# EAGLE board cable-adapter-24 (EAGLE 6.5.0)
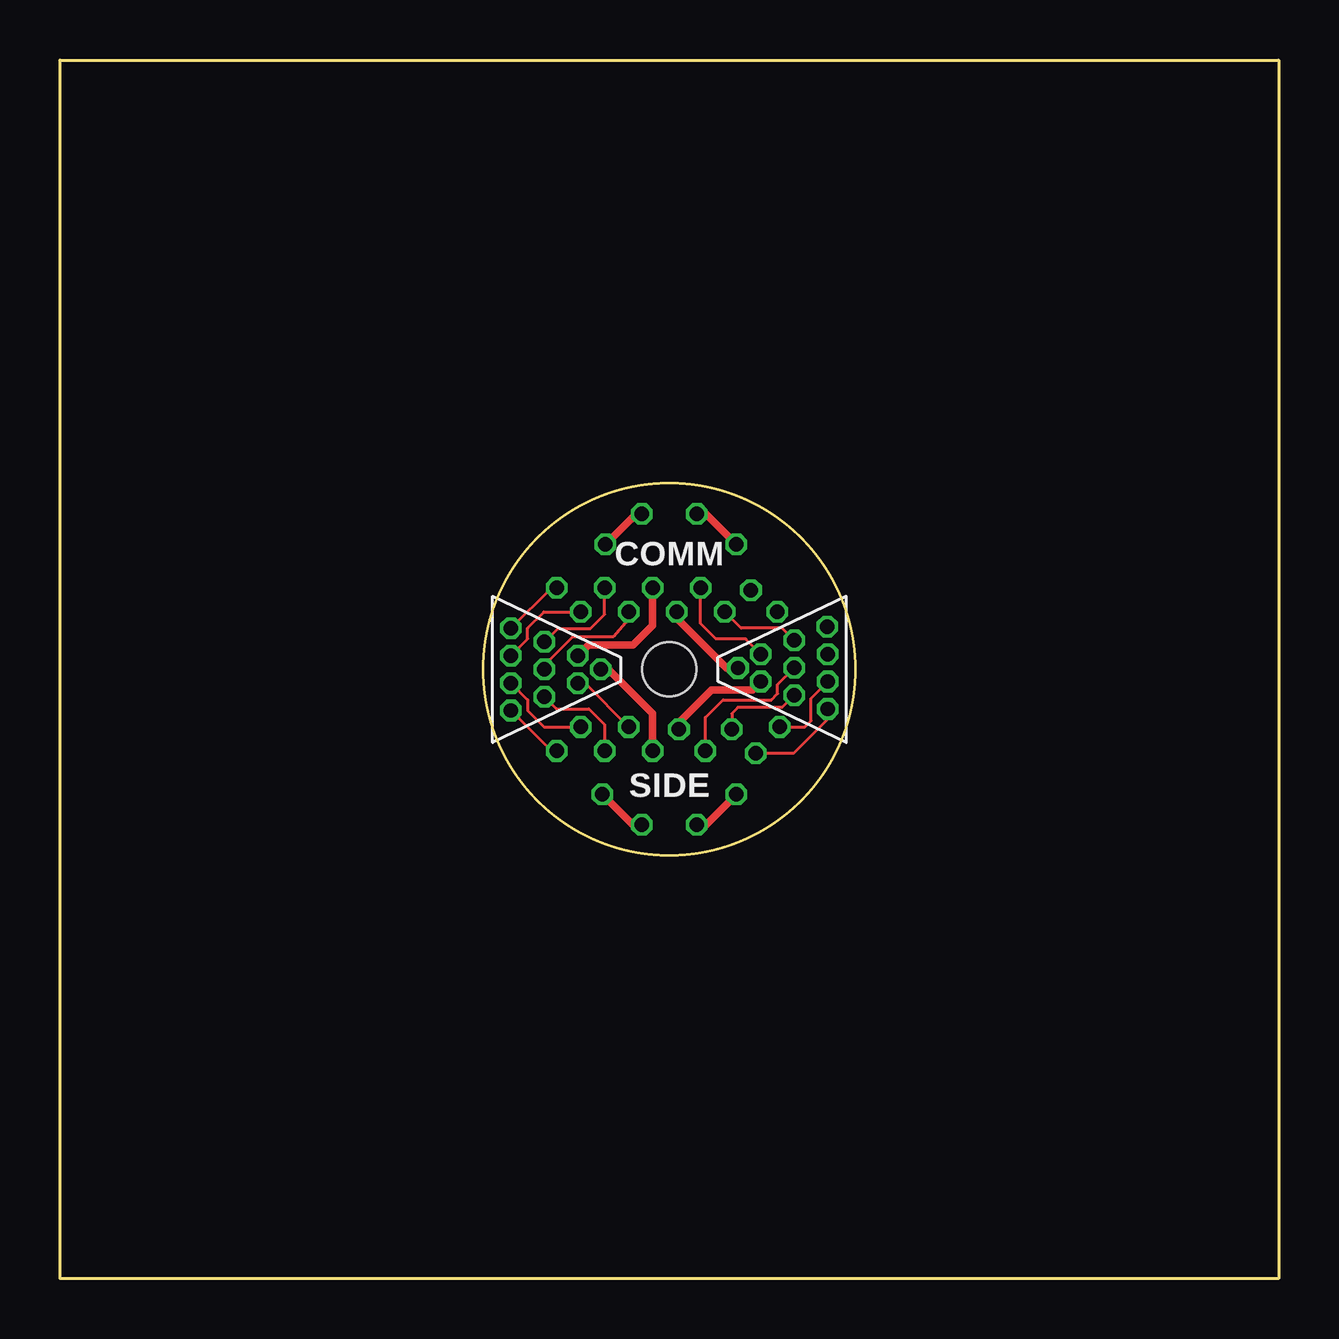
[diagram p0: board, top side]
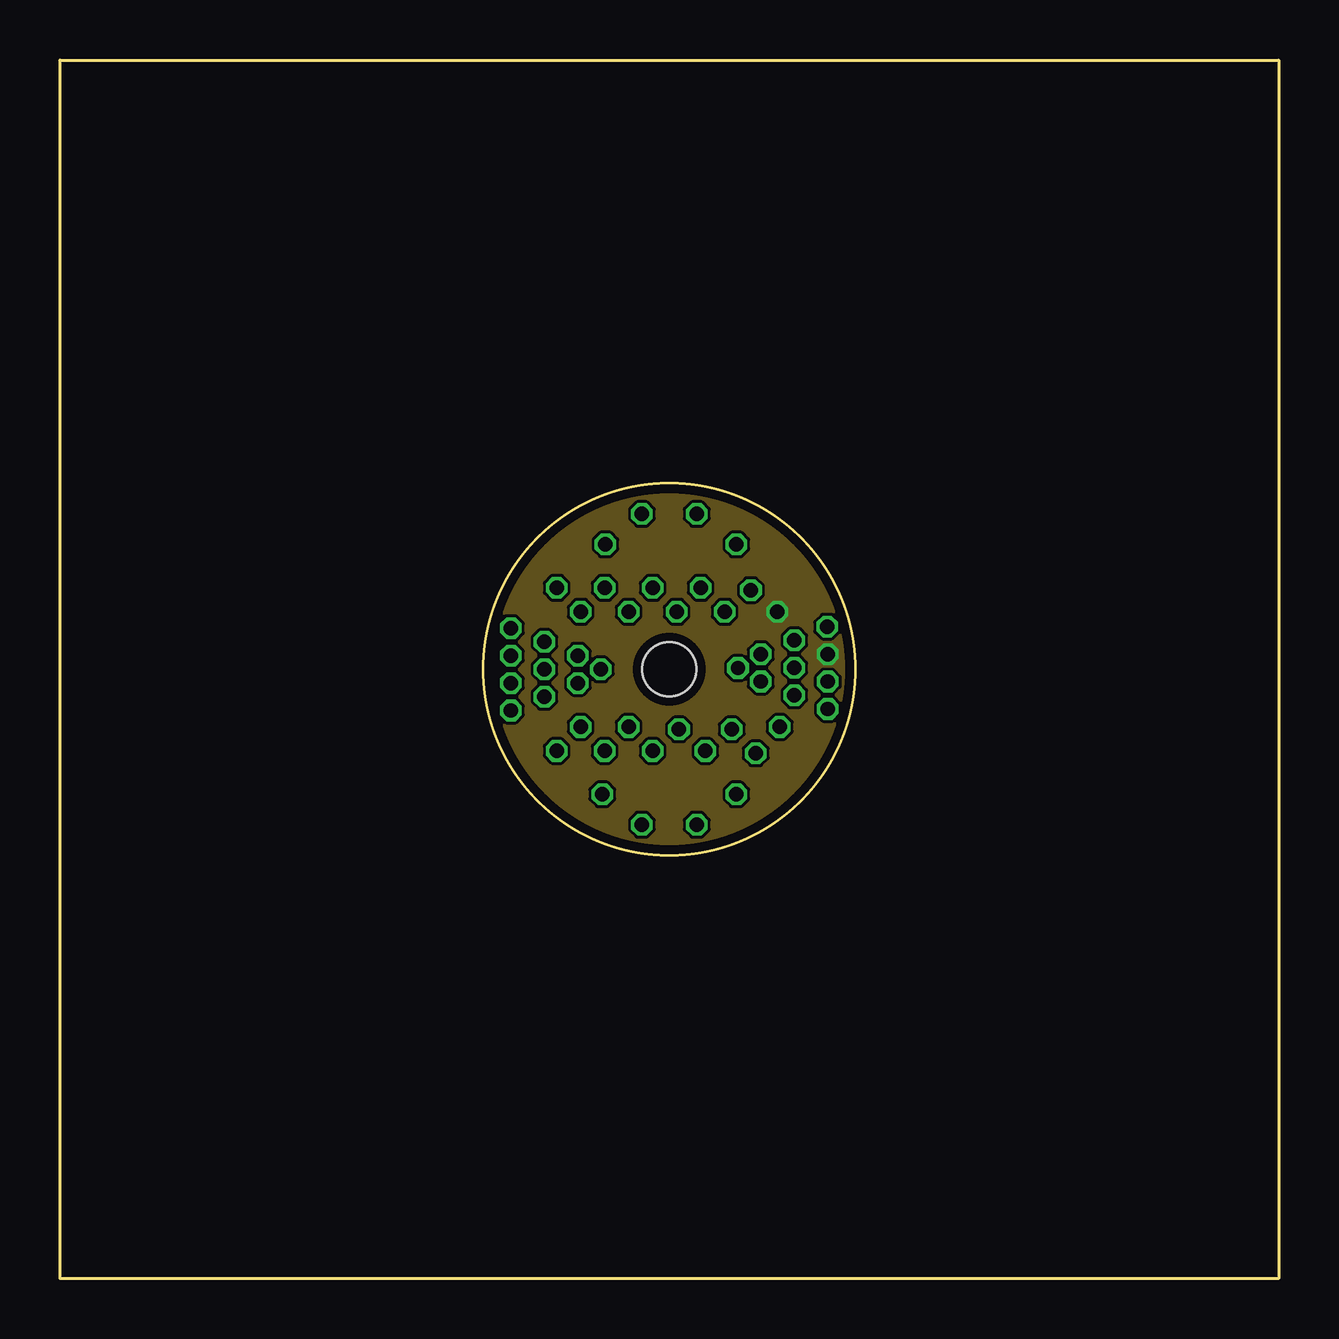
[diagram p1: board, inner layer Route2]
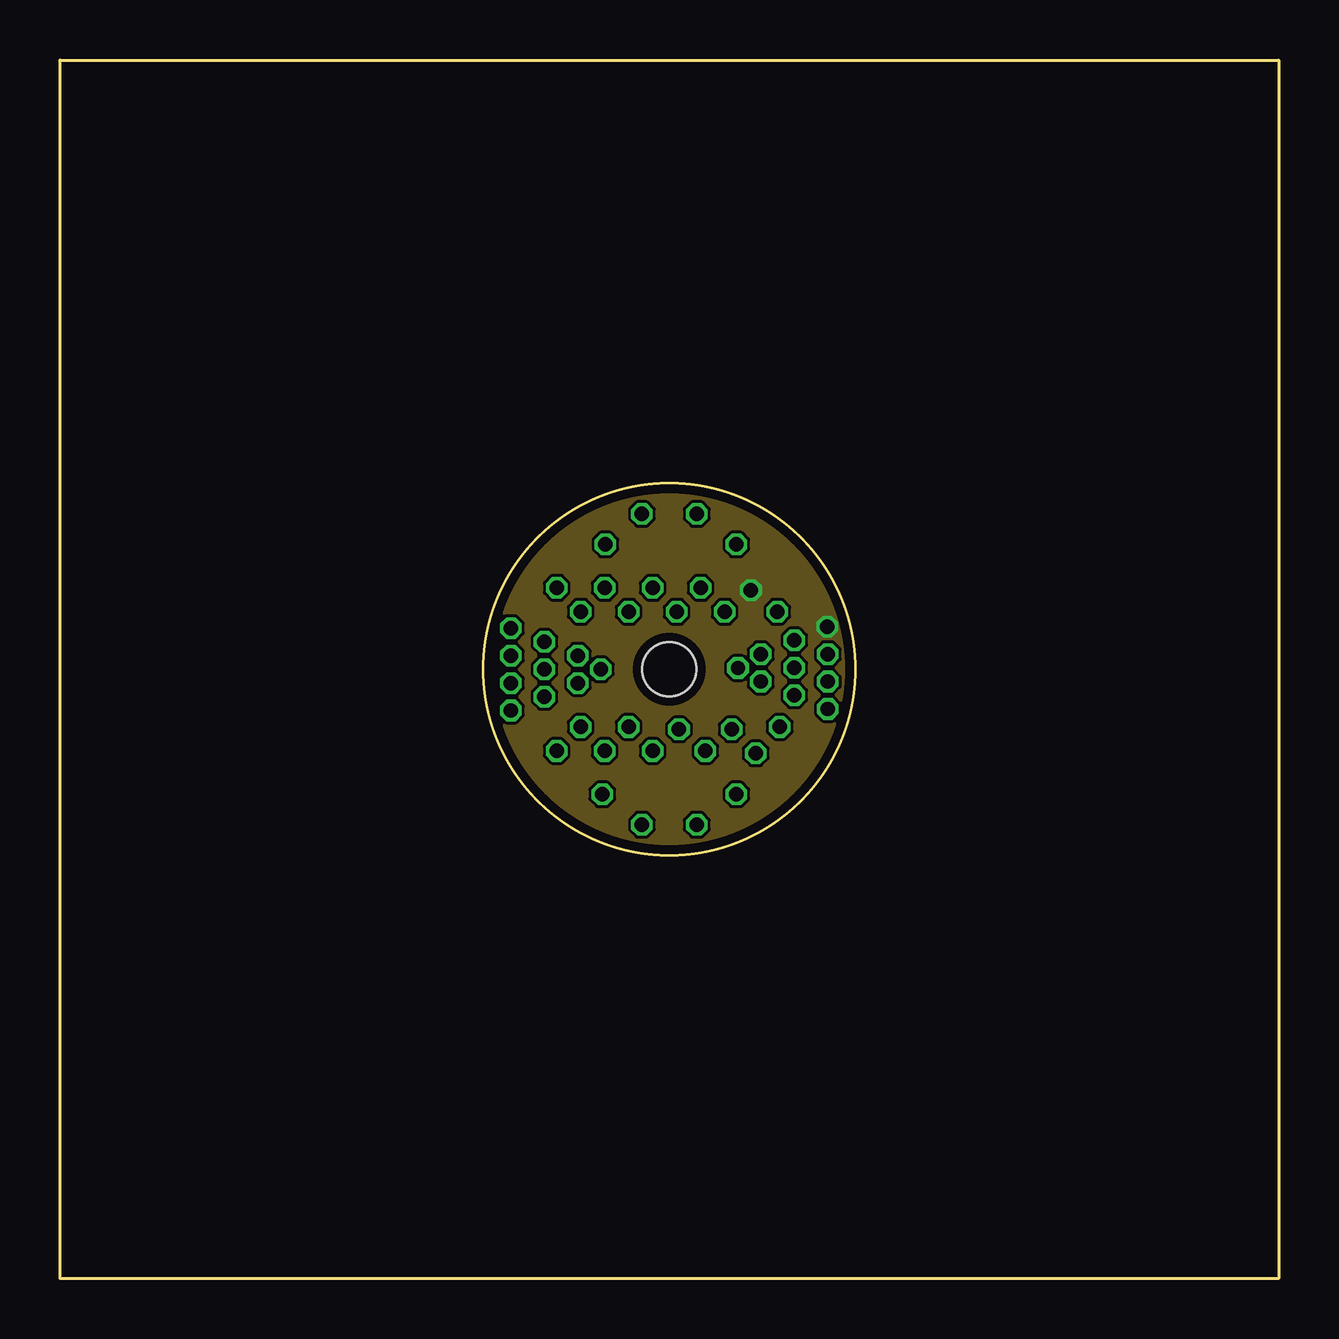
[diagram p2: board, inner layer Route15]
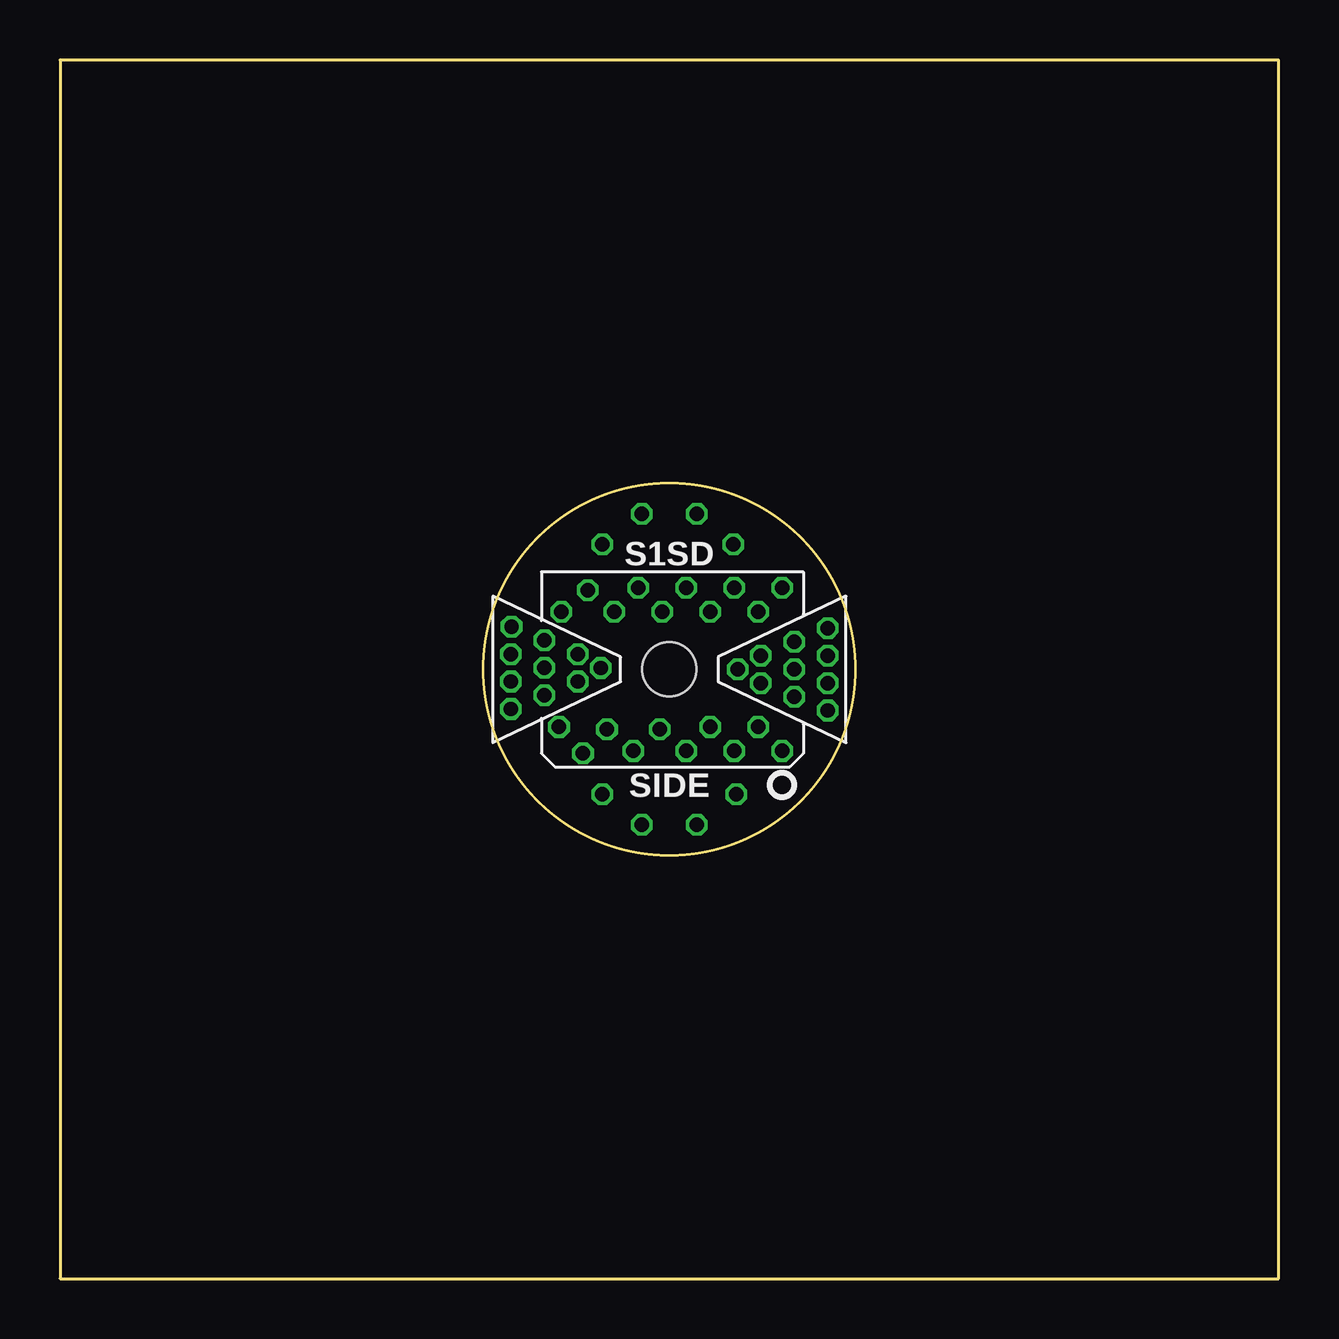
[diagram p3: board, bottom side, seen from below]

Size 50.8 x 50.8 mm. Coordinates in mm from the lower left corner, seen from the top.
Outline: 0,0 0,50.8 50.8,50.8 50.8,0 0,0
Outline: circle at 25.4,25.4 radius 7.75
Copper layers (1*2*15*16): Top 0.035559375mm / dielectric 0.17018125mm / Route2 0.01778125mm / dielectric 47mil / Route15 0.01778125mm / dielectric 0.17018125mm / Bottom 0.035559375mm
Design rules "ohs-park-4-layer": minimum track width 5mil, minimum drill 10mil, track to track 5mil, track to pad 5mil, pad to pad 5mil, via to via 5mil, smd to smd 5mil, copper to edge 15mil, drill to drill 5mil, minimum pad ring 4mil, minimum via ring 4mil, stop-mask expansion 4mil, vias tented up to drill 100mil, thermal gap 10mil
Holes 2.26 mm at 25.4,25.4

## Footprints (pad centres in the part's own frame; a part is rotated, then mirrored left to right if it is on the bottom)
SPI_WIRE+ = drill 0.6 octagon: P$1 0,0

## Placement (x,y rotation side)
_CLK+  [SPI_WIRE+]  18.8,23.69 0 top
_CLK-  [SPI_WIRE+]  18.8,24.83 0 top
_CS+  [SPI_WIRE+]  18.8,27.11 0 top
_CS-  [SPI_WIRE+]  18.8,25.97 0 top
_GND  [SPI_WIRE+]  32,26.04 0 top
_LED+1  [SPI_WIRE+]  21.59,25.97 0 top
_LED+2  [SPI_WIRE+]  28.26,25.46 0 top
_LED-1  [SPI_WIRE+]  22.54,25.4 0 top
_LED-2  [SPI_WIRE+]  29.21,24.89 0 top
_MIS03+  [SPI_WIRE+]  30.61,26.61 0 top
_MISO1+  [SPI_WIRE+]  20.19,26.54 0 top
_MISO1-  [SPI_WIRE+]  20.19,25.4 0 top
_MISO2+  [SPI_WIRE+]  30.61,25.46 0 top
_MISO2-  [SPI_WIRE+]  30.61,24.32 0 top
_MISO3-  MISO3+  [SPI_WIRE+]  29.21,26.04 0 top
_MISO4+  [SPI_WIRE+]  32,24.89 0 bottom
_MISO4-  [SPI_WIRE+]  32,23.75 0 top
_MOSI+  [SPI_WIRE+]  20.19,24.26 0 top
_MOSI-  [SPI_WIRE+]  21.59,24.83 0 top
_USR0  [SPI_WIRE+]  22.61,20.19 0 top
_USR1  [SPI_WIRE+]  28.19,20.19 0 top
_USR2  [SPI_WIRE+]  22.73,30.61 0 top
_USR3  [SPI_WIRE+]  28.19,30.61 0 top
_VCC  [SPI_WIRE+]  31.98,27.18 0 top
CLK+  [SPI_WIRE+]  20.7,22 0 top
CLK-  [SPI_WIRE+]  21.7,23 0 top
CS+  [SPI_WIRE+]  20.7,28.8 0 top
CS-  [SPI_WIRE+]  21.7,27.8 0 top
GND  [SPI_WIRE+]  29.9,27.8 0 top
LED+1  [SPI_WIRE+]  24.7,28.8 0 top
LED+2  [SPI_WIRE+]  25.7,27.8 0 top
LED-1  [SPI_WIRE+]  24.7,22 0 top
LED-2  [SPI_WIRE+]  25.8,22.9 0 top
MISO2+  [SPI_WIRE+]  26.9,22 0 top
MISO2-  [SPI_WIRE+]  28,22.9 0 top
MISO3+  [SPI_WIRE+]  27.7,27.8 0 top
MISO3-  [SPI_WIRE+]  26.7,28.8 0 top
MISO4+  [SPI_WIRE+]  30,23 0 top
MISO4-  [SPI_WIRE+]  29,21.9 0 top
MISO+  [SPI_WIRE+]  22.7,28.8 0 top
MISO-  [SPI_WIRE+]  23.7,27.8 0 top
MOSI+  [SPI_WIRE+]  22.7,22 0 top
MOSI-  [SPI_WIRE+]  23.7,23 0 top
USR0  [SPI_WIRE+]  24.26,18.92 0 top
USR1  [SPI_WIRE+]  26.54,18.92 0 top
USR2  [SPI_WIRE+]  24.26,31.88 0 top
USR3  [SPI_WIRE+]  26.54,31.88 0 top
VCC  [SPI_WIRE+]  28.8,28.7 0 top

## Library data of the parts
_CLK+ _CLK- _CS+ _CS- _GND _LED+1 _LED+2 _LED-1 _LED-2 _MIS03+ _MISO1+ _MISO1- _MISO2+ _MISO2- _MISO3- _MISO4+ _MISO4- _MOSI+ _MOSI- _USR0 _USR1-_USR3 _VCC CLK+ CLK- CS+ CS- GND LED+1 LED+2 LED-1 LED-2 MISO2+ MISO2- MISO3+ MISO3- MISO4+ MISO4- MISO+ MISO- MOSI+ MOSI- USR0 USR1-USR3 VCC = jonnew

## Nets
CS+: _CS-.P$1 CS-.P$1
CS-: _CS+.P$1 CS+.P$1
GND: _GND.P$1 GND.P$1
LED+1: _LED+1.P$1 LED+1.P$1
LED+2: _LED+2.P$1 LED+2.P$1
LED-1: _LED-1.P$1 LED-1.P$1
LED-2: _LED-2.P$1 LED-2.P$1
MIS03-: _MISO3-.P$1 MISO3-.P$1
MISO1+: _MISO1-.P$1 MISO-.P$1
MISO1-: _MISO1+.P$1 MISO+.P$1
MISO2+: _MISO2-.P$1 MISO2-.P$1
MISO2-: _MISO2+.P$1 MISO2+.P$1
MISO3+: _MIS03+.P$1 MISO3+.P$1
MISO4+: _MISO4+.P$1 MISO4+.P$1
MISO4-: _MISO4-.P$1 MISO4-.P$1
MOSI+: _MOSI-.P$1 MOSI-.P$1
MOSI-: _MOSI+.P$1 MOSI+.P$1
SCLK+: _CLK-.P$1 CLK-.P$1
SCLK-: _CLK+.P$1 CLK+.P$1
USR0: _USR0.P$1 USR0.P$1
USR1: _USR1.P$1 USR1.P$1
USR2: _USR2.P$1 USR2.P$1
USR3: _USR3.P$1 USR3.P$1
VCC: _VCC.P$1 VCC.P$1

## Tracks (layer width: path | path; a pad name or v marks a point on that pad's centre or on a via)
CS+
  Top 0.127: _CS-.P$1 19.49,26.67 19.49,27.12 20.17,27.8 CS-.P$1
CS-
  Top 0.127: _CS+.P$1 20.48,28.8 CS+.P$1
GND
  pour Route2 (no thermals): 15.24,35.56 36.83,35.56 36.83,15.24 15.24,15.24
LED+1
  Top 0.305: LED+1.P$1 24.7,27.23 23.88,26.42 22.03,26.42 _LED+1.P$1
LED+2
  Top 0.305: LED+2.P$1 25.7,27.54 27.78,25.46 _LED+2.P$1
LED-1
  Top 0.305: _LED-1.P$1 22.86,25.4 24.7,23.56 LED-1.P$1
LED-2
  Top 0.305: LED-2.P$1 25.8,23.18 27.16,24.54 28.85,24.54 _LED-2.P$1
MIS03-
  Top 0.127: _MISO3-.P$1 28.57,26.67 27.33,26.67 26.7,27.3 MISO3-.P$1
MISO1+
  Top 0.127: MISO-.P$1 23.7,27.51 23.06,26.77 21.38,26.77 20.19,25.59 _MISO1-.P$1
MISO1-
  Top 0.127: _MISO1+.P$1 20.75,27.1 22.11,27.1 22.7,27.69 MISO+.P$1
MISO2+
  Top 0.127: _MISO2-.P$1 30.1,23.81 28.25,23.81 28,23.56 MISO2-.P$1
MISO2-
  Top 0.127: MISO2+.P$1 26.9,23.39 27.64,24.13 29.65,24.13 29.91,24.38 29.91,24.76 _MISO2+.P$1
MISO3+
  Top 0.127: _MIS03+.P$1 30.1,27.11 28.39,27.11 MISO3+.P$1
MISO4+
  Top 0.127: MISO4+.P$1 31.05,23 31.3,23.25 31.3,24.19 _MISO4+.P$1
MISO4-
  Top 0.127: _MISO4-.P$1 32,23.33 30.57,21.9 MISO4-.P$1
MOSI+
  Top 0.127: _MOSI-.P$1 21.88,24.83 MOSI-.P$1
MOSI-
  Top 0.127: _MOSI+.P$1 20.7,23.75 22.05,23.75 22.7,23.1 MOSI+.P$1
SCLK+
  Top 0.127: CLK-.P$1 20.17,23 19.49,23.68 19.49,24.13 _CLK-.P$1
SCLK-
  Top 0.127: _CLK+.P$1 20.48,22 CLK+.P$1
USR0
  Top 0.305: _USR0.P$1 23.88,18.92 USR0.P$1
USR1
  Top 0.305: USR1.P$1 26.92,18.92 _USR1.P$1
USR2
  Top 0.305: _USR2.P$1 24,31.88 USR2.P$1
USR3
  Top 0.305: _USR3.P$1 26.92,31.88 USR3.P$1
VCC
  pour Route15 (no thermals): 13.97,36.83 13.97,13.97 38.1,13.97 38.1,36.83

## Text on the board
tPlace: COMM | SIDE
bPlace: S1SD | SIDE